# Altium PCB HS-1025_ENCODER_PCB_V1.32025-04-24.pcbdoc
Units mm, origin at the board's own origin, x right, y up, seen from the top; angles counter-clockwise.
Board outline 30.25 x 21.75 mm, 2 copper layers (Top Layer, Bottom Layer); 4 components, 3 nets, 14 pads, 0 vias.
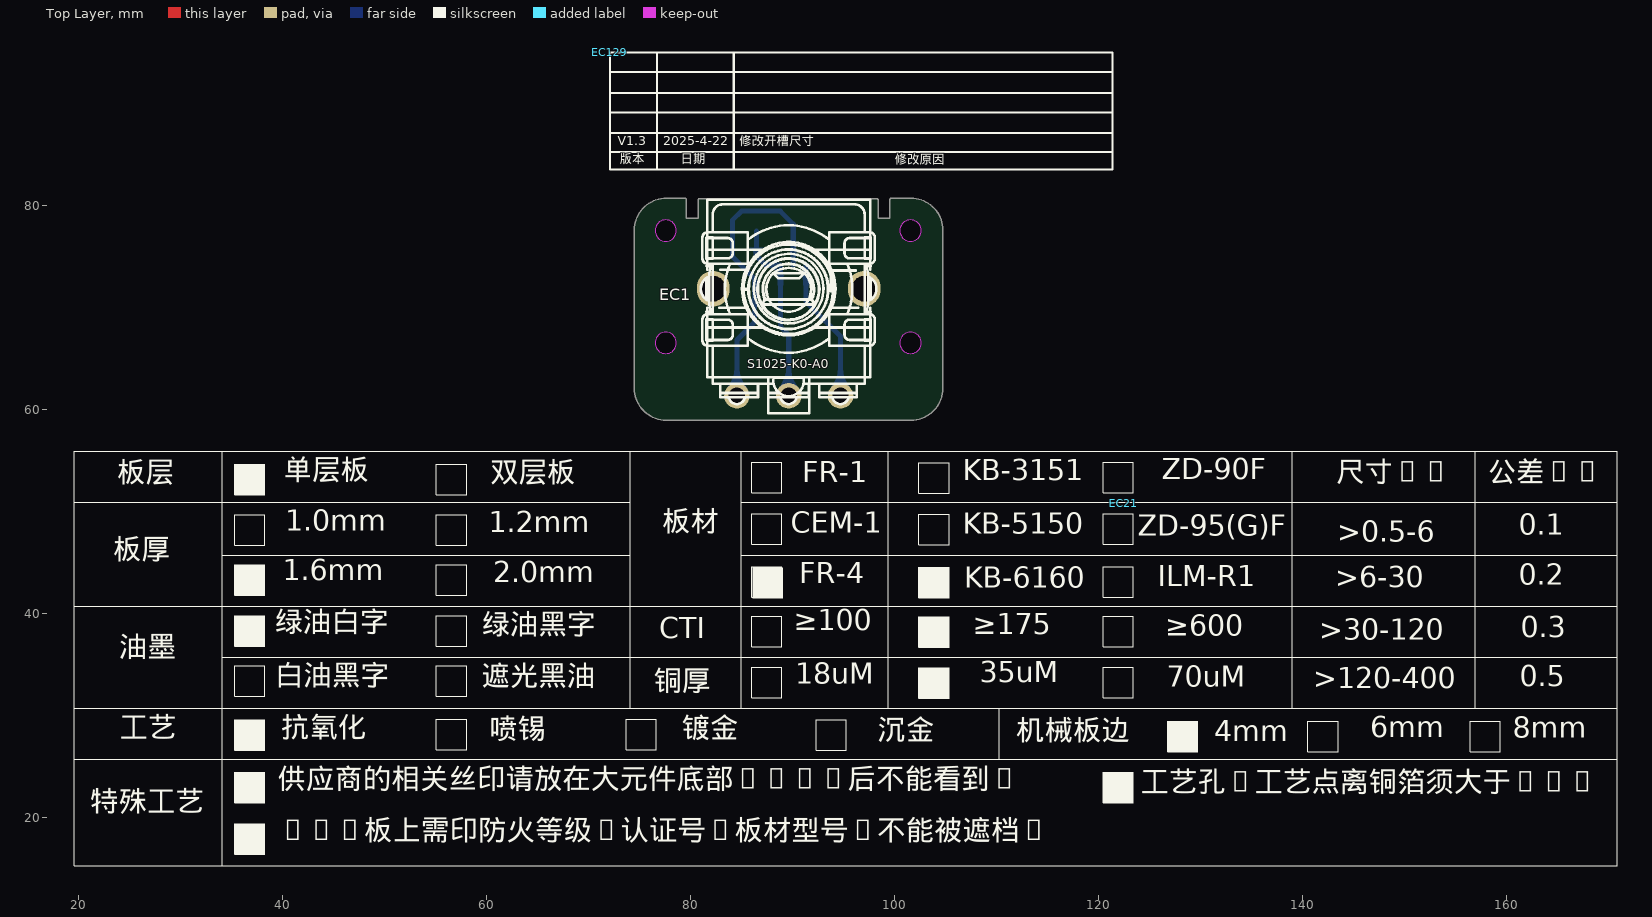
[diagram p0: Top Layer view]
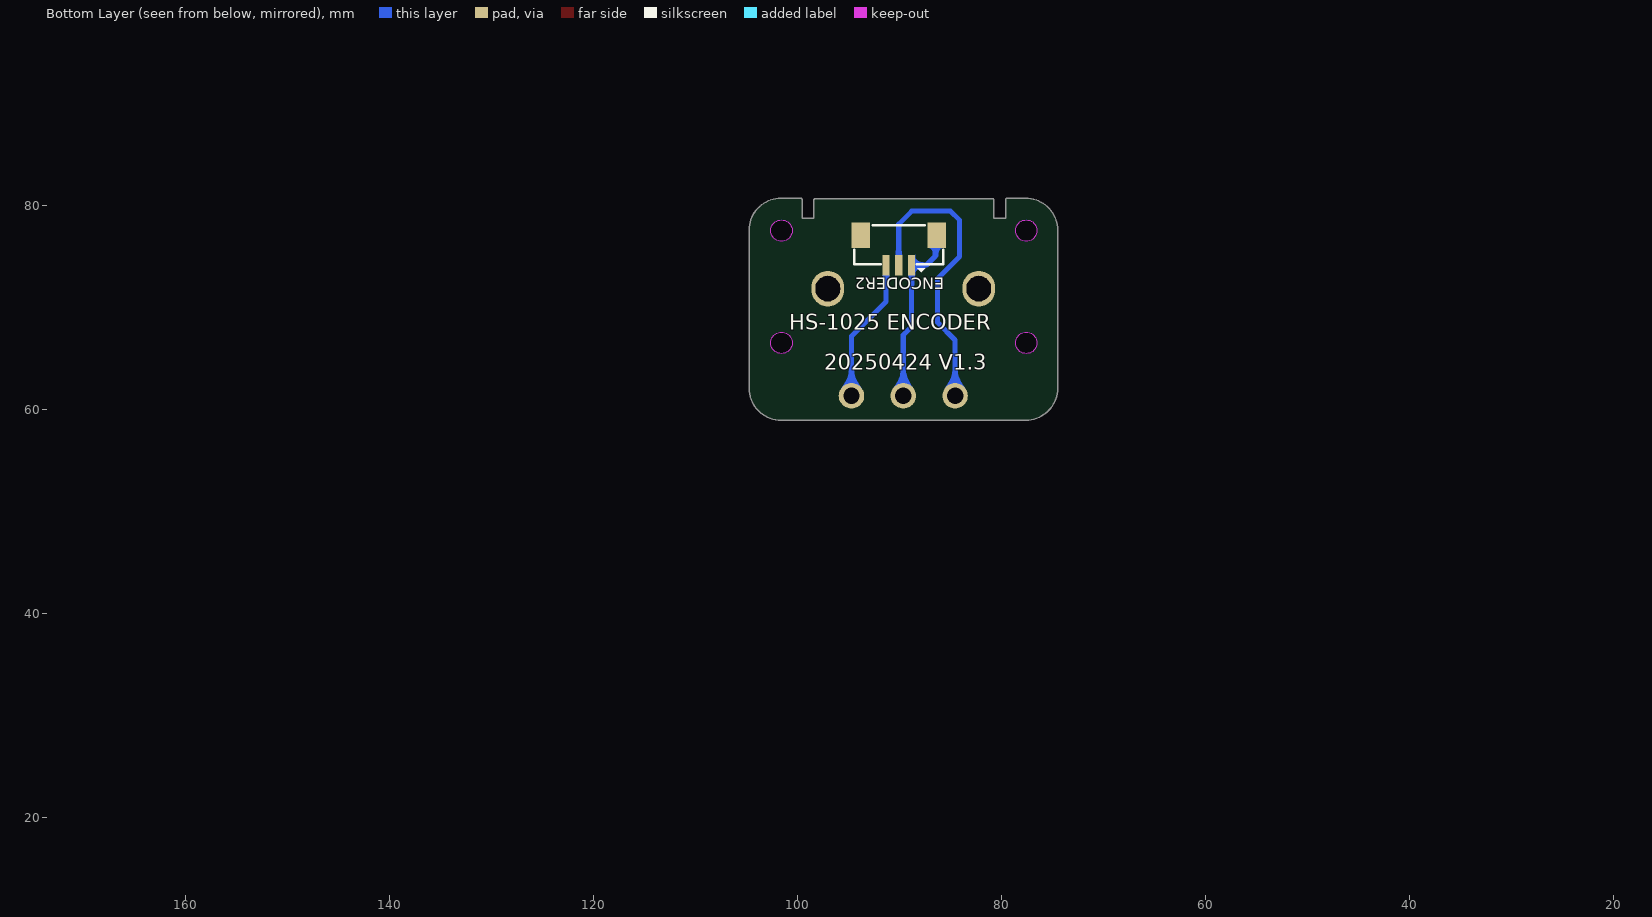
[diagram p1: Bottom Layer view, seen from below]

## Layer stack, top to bottom
Top Solder: solder mask 0.0102, Solder Resist, Dk 3.5
Top Layer: signal copper 0.0356
Dielectric1: dielectric 0.32, FR-4, Dk 4.8
Bottom Layer: signal copper 0.0356
Bottom Solder: solder mask 0.0102, Solder Resist, Dk 3.5

## Board outline
74.528,62.064 ccw(c77.657,62.064) 77.654,58.935 ccw(c77.657,62.064) 77.657,58.935 cw(c77.657,59.063) 77.654,58.935 77.657,58.935 101.654,58.935 ccw(c101.654,59.063) 101.657,58.935 ccw(c101.654,62.064) 104.783,62.064 104.783,77.561 ccw(c101.654,77.561) 101.654,80.69 99.715,80.69 ccw(c99.715,80.563) 99.587,80.563 99.587,78.74 98.432,78.74 98.432,80.518 ccw(c98.305,80.518) 98.305,80.645 80.915,80.645 ccw(c80.915,80.518) 80.787,80.518 80.787,78.744 79.632,78.744 79.632,80.563 ccw(c79.505,80.563) 79.505,80.69 77.657,80.69 ccw(c77.657,77.561) 74.528,77.561 ccw(c74.656,77.561) 74.528,77.559
cut-out: 100.56,66.516 ccw(c101.61,66.516) 101.61,65.466 ccw(c101.61,66.516) 102.66,66.516 ccw(c101.61,66.516) 101.61,67.566 ccw(c101.61,66.516)
cut-out: 100.56,77.516 ccw(c101.61,77.516) 101.61,76.466 ccw(c101.61,77.516) 102.66,77.516 ccw(c101.61,77.516) 101.61,78.566 ccw(c101.61,77.516)
cut-out: 76.56,77.516 ccw(c77.61,77.516) 77.61,76.466 ccw(c77.61,77.516) 78.66,77.516 ccw(c77.61,77.516) 77.61,78.566 ccw(c77.61,77.516)
cut-out: 76.56,66.516 ccw(c77.61,66.516) 77.61,65.466 ccw(c77.61,66.516) 78.66,66.516 ccw(c77.61,66.516) 77.61,67.566 ccw(c77.61,66.516)

## Design rules (kind name [scope] priority, off if disabled: settings)
Clearance [All] p1: gap=0.254
PolygonConnect [All] p1: connectstyle=Relief reliefconductorwidth=0.254 reliefentries=4 polygonreliefangle="90 Angle" airgapwidth=0.254
RoutingVias [All] p1: holewidth=0.711 width=1.27 viastyle="Through Hole" minholewidth=0.711 minwidth=1.27 maxholewidth=0.711 maxwidth=1.27
SolderMaskExpansion [All] p1: expansion=0.102
Width [All] p1: maxlimit=0.254 minlimit=0.254 preferedwidth=0.254
30 further rules are at their usual default settings.

## Components (designator, comment, footprint, x,y, rotation, side; value= is the part's Value field where it differs from the comment)
EC1 "PEC16-4220F-N0024" SW-SMD_PEC16-4120F-N0012 89.667,66.576 r0 top
EC21 "Comment" 工艺要求FR4单面 95.25,35.56 r0 top
EC129 "Comment" 版本修改 72.136,94.996 r0 top
ENCODER2 "ZX-MX1.25-3PLT" CONN-SMD_3P-P1.25_MEGASTAR_ZX-MX1.25-3PLT 90.107,75.613 r180 bottom

## Footprints (in the part's own frame and the unit in brackets; to place one, negate y for a bottom-side part, rotate by r counter-clockwise, add the part's x,y. Pads: shape width x height; smd on the part's side, far side on the other; paste and mask are expansions set on the pad)
CONN-SMD_3P-P1.25_MEGASTAR_ZX-MX1.25-3PLT [mm]
  rect 0.7x2 smd paste+0 mask+0.05: 1(1.25,-1.475) 2(0,-1.475) 3(-1.25,-1.475)
  rect 1.8x2.5 smd paste+0 mask+0.05: 4(-3.73,1.475) 5(3.73,1.475)
  silkscreen extent -4.38,-2.16 4.37,2.42
SW-SMD_PEC16-4120F-N0012 [mm]
  oval 3.2x3.5 hole 2.4 slot 2.5 at 90 deg paste+0 mask+0.051: 6(-7.4,5.25) 6(7.4,5.25)
  round 2.5 hole 1.6 paste+0 mask+0.051: A(-5.08,-5.25) B(0,-5.25) C(5.08,-5.25)
  silkscreen extent -8,-6.95 8,13.95
工艺要求FR4单面 [mil]
  round 5 on Top Overlay: 1(-831.3,398.3) 1(-831.3,603.02) 1(-831.3,799.87) 1(2977.08,398.3)
  silkscreen extent -2977,-800 2977,800
版本修改 [mm]
  silkscreen extent 0,-11.51 49.28,0

## Nets (pads, with @x,y where several pads share a name; then routed paths per layer and width w, separated by ;. In a path a pad name is that pad's centre, name@x,y a point inside that pad or via, vN(x,y) a via of type N, cw(c..) or ccw(c..) an arc to the next point about the centre after c; other vN are vias at no path point)
ECA: EC1.A ENCODER2.2 | length 29.7
  Bottom Layer w0.5: EC1.A 84.587,66.792 86.297,68.501 86.297,72.819 84.138,74.978 84.138,78.534 85.027,79.423 88.837,79.423 90.107,78.153 ENCODER2.2
ECB: EC1.C ENCODER2.3 | length 14.2
  Bottom Layer w0.5: ENCODER2.3 91.357,70.553 94.747,67.163 EC1.C
GND: EC1.B ENCODER2.1 ENCODER2.4 ENCODER2.5 | length 18.3
  Bottom Layer w0.5: ENCODER2.5@86.504,77.469 86.504,75.025 87.391,74.138 ENCODER2.1 88.857,68.1 89.667,67.29 EC1.B
pads on no net: EC1.6 EC21.1

## Keep-outs
Mechanical 1:
  circle w0.254: c77.656,77.562 r1.05
  circle w0.254: c77.656,66.562 r1.05
  circle w0.254: c101.656,66.562 r1.05
  circle w0.254: c101.656,77.562 r1.05

## Silkscreen, mask and mechanical layers (free items; w line width, h text height)
Top Overlay:
  drawing of 152 lines, arcs and shapes, not listed
  text "V1.3" at 72.898,85.598 h1.52
  text "2025-4-22" at 77.343,85.598 h1.52
  text "修改开槽尺寸" at 84.836,85.598 h1.52
  text "S1025-K0-A0" at 85.598,63.754 h1.52
Bottom Overlay:
  text "HS-1025 ENCODER" at 100.838,67.818 h1.5
  text "20250424 V1.3" at 97.409,63.893 h1.5
Mechanical 1:
  lines w0.254: 79.505,78.616 79.505,80.563 77.657,80.563 ccw(c77.657,77.561) 74.656,77.561 74.656,62.064 ccw(c77.657,62.064) 77.657,59.063 101.654,59.063 ccw(c101.654,62.064) 104.656,62.064 104.656,77.561 ccw(c101.654,77.561) 101.654,80.563 99.715,80.563 99.715,78.613 98.305,78.613 98.305,80.518 80.915,80.518 80.915,78.616 ; 79.585,78.616 80.835,78.616

## Text inside footprints (layer, text, board x,y; h text height)
EC21: Top Overlay "遮光黑油" at 59.563,32.207 h3.5; Top Overlay "板层" at 23.823,52.17 h3.5; Top Overlay "单层板" at 40.181,52.424 h3.5; Top Overlay "双层板" at 60.399,52.17 h3.5; Top Overlay "FR-1" at 91.008,52.172 h3.5; Top Overlay "板厚" at 23.444,44.602 h3.5; Top Overlay "油墨" at 24.028,35.077 h3.5; Top Overlay "工艺" at 24.102,27.151 h3.5; Top Overlay "特殊工艺" at 21.184,19.888 h3.5; Top Overlay "1.0mm" at 40.333,47.395 h3.5; Top Overlay "1.6mm" at 40.079,42.544 h3.5; Top Overlay "绿油白字" at 39.295,37.492 h3.5; Top Overlay "白油黑字" at 39.319,32.258 h3.5; Top Overlay "抗氧化" at 39.903,27.178 h3.5; Top Overlay "供应商的相关丝印请放在大元件底部(DIP后不能看到)" at 39.571,22.122 h3.5; Top Overlay "PCB板上需印防火等级,认证号,板材型号(不能被遮档)" at 39.673,17.067 h3.5; Top Overlay "1.2mm" at 60.272,47.268 h3.5; Top Overlay "2.0mm" at 60.678,42.366 h3.5; Top Overlay "板材" at 77.265,47.37 h3.5; Top Overlay "绿油黑字" at 59.561,37.286 h3.5; Top Overlay "喷锡" at 60.3,27.026 h3.5; Top Overlay "CTI" at 76.962,36.881 h3.5; Top Overlay "铜厚" at 76.454,31.725 h3.5; Top Overlay "≥600" at 126.591,37.108 h3.5; Top Overlay "CEM-1" at 89.865,47.219 h3.5; Top Overlay "FR-4" at 90.701,42.239 h3.5; Top Overlay "≥100" at 90.142,37.667 h3.5; Top Overlay "18uM" at 90.295,32.409 h3.5; Top Overlay "≥175" at 107.719,37.26 h3.5; Top Overlay "35uM" at 108.405,32.536 h3.5; Top Overlay "70uM" at 126.718,32.13 h3.5; Top Overlay "KB-6160" at 106.881,41.807 h3.5; Top Overlay "ILM-R1" at 125.829,41.985 h3.5; Top Overlay "沉金" at 98.4,26.924 h3.5; Top Overlay "镀金" at 79.197,27.127 h3.5; Top Overlay "机械板边" at 111.963,26.873 h3.5; Top Overlay "工艺孔,工艺点离铜箔须大于1mm" at 124.181,21.844 h3.5; Top Overlay "4mm" at 131.367,26.796 h3.5; Top Overlay "6mm" at 146.657,27.151 h3.5; Top Overlay "8mm" at 160.653,27.126 h3.5; Top Overlay "KB-5150" at 106.729,47.09 h3.5; Top Overlay "KB-3151" at 106.703,52.348 h3.5; Top Overlay "ZD-90F" at 126.236,52.45 h3.5; Top Overlay "ZD-95(G)F" at 123.901,46.939 h3.5; Top Overlay "尺寸cm" at 143.33,52.196 h3.5; Top Overlay "公差mm" at 158.214,52.196 h3.5; Top Overlay ">0.5-6" at 143.432,46.328 h3.5; Top Overlay ">6-30" at 143.228,41.858 h3.5; Top Overlay ">30-120" at 141.654,36.702 h3.5; Top Overlay ">120-400" at 141.069,31.952 h3.5; Top Overlay "0.1" at 161.214,47.041 h3.5; Top Overlay "0.2" at 161.212,42.137 h3.5; Top Overlay "0.3" at 161.44,36.956 h3.5; Top Overlay "0.5" at 161.313,32.18 h3.5
EC129: Top Overlay "修改原因" at 100.051,83.769 h1.52; Top Overlay "日期" at 79.07,83.845 h1.52; Top Overlay "版本" at 73.101,83.845 h1.52